# Altium PCB PCB_Sensores_PIC24-temp.PcbDoc (part 2 of 2)
Units mm, origin at the board's own origin, x right, y up, seen from the top; angles counter-clockwise.
Board outline 86.12 x 83.94 mm, 4 copper layers (Top Layer, Layer 1, Layer 4, Bottom Layer), stack 0.603 mm thick; 142 components, 90 nets, 531 pads, 94 vias.
Unrouted connection lines stored in the file: 1.
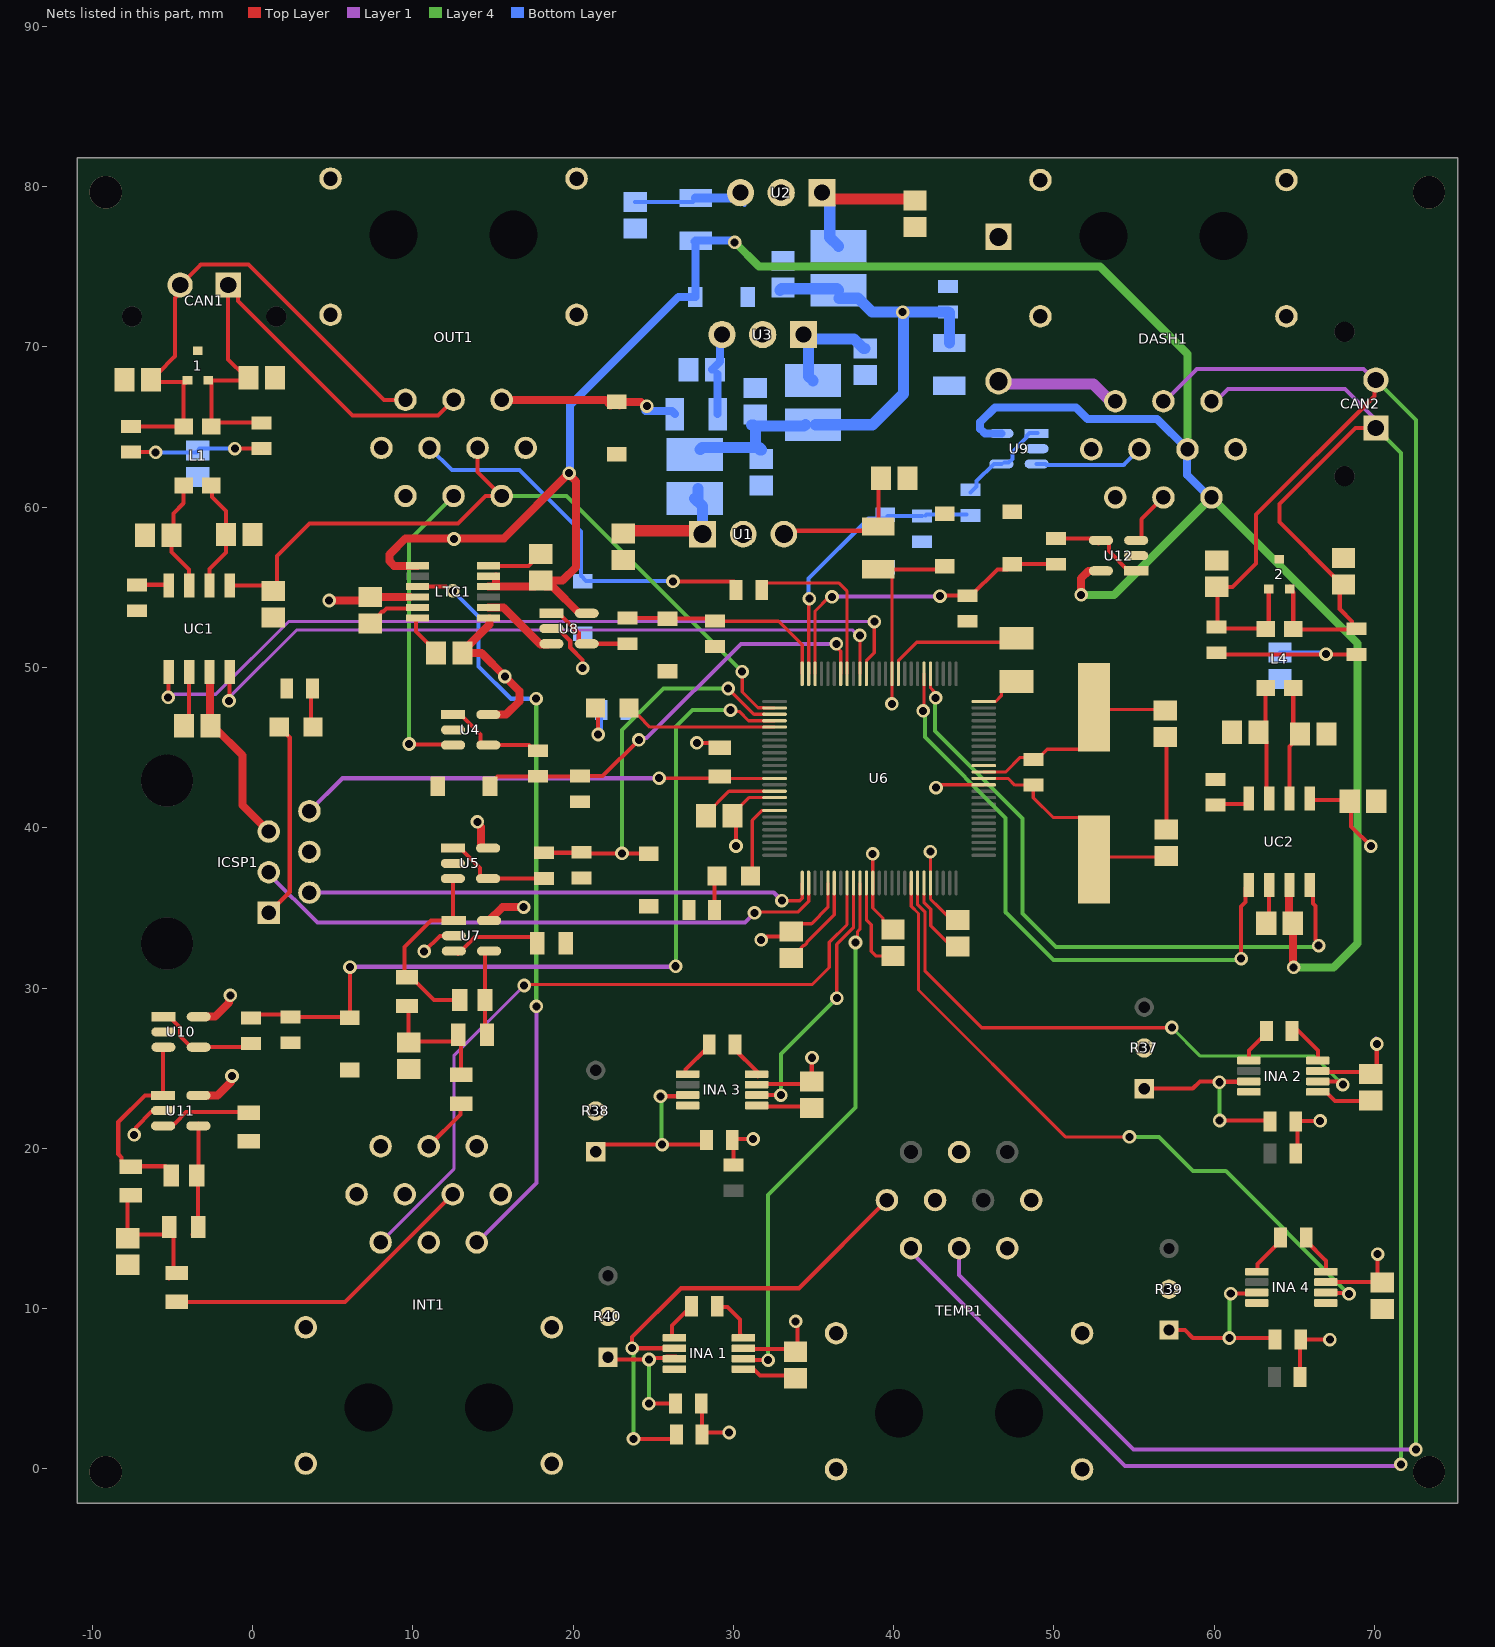
[diagram p4: the nets of this part, all layers, seen from the top]

## Via types
v1: diameter 0.85, hole 0.5, Top Layer to Bottom Layer, 90 vias
v2: diameter 2, hole 2, Top Layer to Bottom Layer, 4 vias

## Nets (pads, with @x,y where several pads share a name; then routed paths per layer and width w, separated by ;. In a path a pad name is that pad's centre, name@x,y a point inside that pad or via, vN(x,y) a via of type N, cw(c..) or ccw(c..) an arc to the next point about the centre after c; other vN are vias at no path point) (continued)
3.3V: "INA 1.7" "INA 2.7" "INA 3.7" "INA 4.7" C11.1 C12.1 C14.1 C15.1 C20.2 C21.2 C25.2 C26.2 CC2.2 CC4.2 F1.2 OUT1.3 OUT1.6 R28.1 R29.2 R30.1 R31.2 R32.1 R33.2 R34.1 R35.2 R36.1 U6.2 U6.16 U6.30 U6.37 U6.46 U6.62 U6.86 UC1.5 UC2.5 Z2.1 | length 124.6
  Top Layer w0.2: C11.1@29.98,41.09 30.179,41.09 30.969,41.88 U6.16@32.57,41.88 ; v1(30.55,49.74) 30.55,48.47 31.534,47.486 31.889,47.486 31.895,47.48 U6.2@32.57,47.48 ; C14.1@33.61,33.536 34.092,34.018 34.878,34.018 35.895,35.035 U6.30@35.895,36.555 ; v1@38.695,38.365 U6.37@38.695,36.555 38.695,34.995 39.332,34.358 39.332,34.183 39.676,33.839 C12.1@39.851,33.839 ; F1.2@39.423,56.126 39.895,55.655 U6.86@39.895,49.605 v1@39.895,47.742 ; v1@42.295,38.501 U6.46@42.295,36.555 42.295,35.88 42.295,35.55 42.802,35.043 43.329,34.516 C15.1@43.43,34.516 ; v1(42.64,42.5) 42.816,42.5 42.996,42.68 U6.62@45.62,42.68
  Top Layer w0.254: UC1.5@-1.415,54.685 UC1.5@-1.415,55.11 0.59,55.11 CC2.2@0.691,55.211 ; CC2.2@1.515,54.89 1.515,56.965 3.54,58.99 12.82,58.99 14.53,60.7 OUT1.3@15.54,60.7 14.04,62.2 OUT1.6@14.04,63.56 ; v1(27.72,45.3) 28.59,45.3 28.89,45 R28.1@29.14,45 ; R35.2@27.95,3.92 28.05,3.82 R36.1@28.05,2.16 28.16,2.27 v1(29.74,2.27) ; R32.1@29.9,18.85 R32.1@30,18.95 30,20.4 R31.2@29.97,20.43 ; R31.2@29.93,20.51 30.005,20.585 v1(31.23,20.585) ; C11.1@29.94,40.75 30.16,40.53 v1(30.16,38.86) ; 30.703,7.49 C21.2@33.42,7.49 ; 31.45,23.975 31.49,24.015 34.739,24.015 C26.2@34.89,24.166 34.89,25.635 v1(34.907,25.651) ; v1(31.731,33.002) 31.893,33.002 32.101,33.21 33.284,33.21 C14.1@33.61,33.536 ; v1(33.88,9.211) 33.99,9.101 C21.2@33.99,7.486 ; v1(38.689,38.371) v1@38.695,38.365 ; F1.2@39.05,56.126 39.423,56.126 Z2.1@42.963,56.126 ; v1(39.888,47.735) v1@39.895,47.742 ; v1(42.282,38.513) v1@42.295,38.501 ; Z2.1@42.954,56.253 Z2.1@43.09,56.39 ; R30.1@65.08,19.67 65.08,19.603 R30.1@65.19,19.493 ; R29.2@65.08,21.67 65.19,21.67 65.23,21.71 v1(66.61,21.71) ; R30.1@65.11,19.35 65.19,19.43 R30.1@65.19,19.493 ; R30.1@65.19,19.603 R30.1@65.19,19.493 ; R30.1@65.19,19.67 R29.2@65.19,21.55 ; R30.1@65.353,19.33 R30.1@65.19,19.493 ; R34.1@65.36,5.73 65.36,7.84 R33.2@65.52,8 ; R33.2@65.42,8.06 v1(67.21,8.06) ; UC2.5@65.95,41.73 68.055,41.73 CC4.2@68.07,41.745 ; 66.633,24.803 66.637,24.808 ; 66.91,24.76 C20.2@69.506,24.76 ; 66.98,11.58 67.055,11.655 69.821,11.655 C25.2@69.84,11.636 ; CC4.2@68.454,41.65 68.53,41.574 68.53,40.09 v1(69.77,38.85) ; C20.2@70.056,24.82 70.14,24.904 v1(70.14,26.51) ; v1(70.19,13.4) 70.19,12.136 70.726,11.6 C25.2@70.74,11.6
  Layer 1 w0.254: v1@69.77,38.733 v1(69.77,38.85) ; v1@69.97,26.73 v1@70.1,26.86
  Layer 4 w0.254: OUT1.3@15.65,60.77 15.72,60.7 19.59,60.7 v1(30.55,49.74)
4+: "INA 1.2" R36.2 TEMP1.7 | length 31.3
  Top Layer w0.254: v1(23.77,1.87) 26.177,1.87 26.45,2.143 R36.2@26.45,2.16 ; 26.32,7.525 26.317,7.528 23.683,7.528 v1(23.68,7.53) 23.68,8.22 26.73,11.27 34.08,11.27 TEMP1.7@39.58,16.77
  Layer 4 w0.254: v1(23.68,7.53) 23.77,7.44 v1(23.77,1.87)
12V: F3.2 OUT1.10 Z3.1 | length 11.5
  Top Layer w0.254: Z3.1@22.622,66.487 Z3.1@22.89,66.22
  Top Layer w0.5: OUT1.10@15.71,66.53 15.88,66.7 22,66.7 Z3.1@22.34,66.36 ; Z3.1@22.71,66.575 Z3.1@23.075,66.575 ; Z3.1@22.736,66.476 Z3.1@23.075,66.575 ; v1(24.601,66.309) 24.506,66.309 24.241,66.575 Z3.1@23.075,66.575
  Bottom Layer w0.5: v1@24.501,65.999 26.161,65.999 F3.2@26.35,65.81
24V: C3.1 C6.1 C9.1 F4.1 L2.1 L3.1 L5.1 RV1.1 | length 33.3
  Bottom Layer w0.7: L2.1@27.93,63.6 28.055,63.725 31.514,63.725 ; 31.13,65.12 31.255,65.12 31.315,65.06 ; 31.31,65.06 31.315,65.06 ; C6.1@32.9,73.53 32.995,73.625 36.46,73.625 L3.1@36.55,73.535 ; L5.1@34.49,65.145 34.405,65.06 31.315,65.06 ; L5.1@35.125,65.145 38.685,65.145 40.62,67.08 40.62,72.111 v1(40.563,72.168) ; L3.1@36.59,73.04 37.77,73.04 38.64,72.17 RV1.1@43.39,72.17 ; RV1.1@43.46,72.14 43.48,72.12 F4.1@43.48,70.243 ; 31.315,65.06 31.382,64.993 31.382,63.857 31.514,63.725 ; 31.514,63.725 31.659,63.58 31.76,63.58 31.615,63.725 31.514,63.725
+5: C22.1 C23.1 C24.1 CC1.1 CC3.1 DASH1.3 DASH1.6 F2.2 ICSP1.5 INT1.3 INT1.6 INT1.9 LTC1.1 LTC1.4 LTC1.5 LTC1.7 LTC1.10 U4.5 U5.5 U7.5 U8.5 U9.5 U10.5 U11.5 U12.5 UC1.3 UC2.3 Z1.1 | length 200
  Top Layer w0.5: U11.5@-3.379,23.3 -2.19,23.3 -1.346,24.144 -1.346,24.445 v1(-1.279,24.512) ; U10.5@-3.36,28.21 -2.34,28.21 -1.458,29.092 -1.458,29.474 v1(-1.391,29.541) ; CC1.1@-2.66,46.55 -2.66,46.485 -2.45,46.275 -2.385,46.275 -0.63,44.52 -0.63,41.405 ICSP1.5@1.01,39.765 ; UC1.3@-2.66,49.39 -2.66,47.168 -2.655,47.163 CC1.1@-2.655,46.825 ; v1(4.781,54.179) 7.124,54.179 C22.1@7.34,54.396 7.345,54.39 LTC1.10@9.825,54.39 ; LTC1.7@10.298,56.345 8.828,56.345 8.535,56.638 8.535,57.052 9.543,58.06 v1@12.57,58.06 ; v1(12.57,58.02) v1@12.57,58.06 ; v1(14.03,40.37) 14.03,40.275 14.249,40.056 14.249,38.763 14.283,38.73 U5.5@14.697,38.73 ; U4.5@14.71,47.06 15.82,47.06 16.643,47.883 16.643,48.537 v1(15.74,49.44) 15.74,49.45 14.29,50.9 C23.1@13.106,50.9 13.106,51.001 14.79,52.685 LTC1.1@14.79,53.07 ; LTC1.4@14.722,55.045 LTC1.4@15.225,55.045 ; U7.5@14.756,34.21 15.592,35.046 v1(16.909,35.046) ; LTC1.5@15.184,55.67 15.184,55.086 LTC1.4@15.225,55.045 ; C24.1@18.08,55.24 18.273,55.047 18.718,55.047 20.384,53.38 U8.5@20.851,53.38 ; v1(51.693,54.531) 51.693,55.563 52.146,56.016 52.916,56.016 U12.5@52.93,56.03 ; UC2.3@64.65,36.05 64.65,34.286 CC3.1@64.896,34.04 64.943,33.993 64.923,33.973 64.923,31.317 v1(64.95,31.29) ; v1@12.57,58.06 15.68,58.06 v1(19.75,62.13) 19.75,62.035 20.19,61.595 20.19,56.27 19.344,55.424 C24.1@17.97,55.424 17.593,55.047 17.201,55.047 17.199,55.045 LTC1.4@15.225,55.045
  Layer 4 w0.5: v1(30.081,76.53) 31.601,75.01 52.87,75.01 58.33,69.55 DASH1.6@58.33,63.61 ; v1(51.693,54.531) 53.751,54.531 DASH1.3@59.83,60.61 ; DASH1.3@60.076,60.316 60.124,60.316 68.93,51.51 68.93,32.78 67.44,31.29 v1@64.986,31.29
  Bottom Layer w0.5: v1(19.75,62.13) 19.817,62.197 19.817,66.367 26.563,73.113 Z1.1@27.625,73.113 27.625,76.525 F2.2@27.58,76.57 ; F2.2@27.64,76.626 29.89,76.626 30,76.516 v1@30,76.45 ; U9.5@46.72,64.6 45.69,64.6 45.397,64.893 45.397,65.307 46.32,66.23 51.38,66.23 52.1,65.51 56.43,65.51 DASH1.6@58.33,63.61 ; DASH1.6@58.31,63.51 58.31,62.01 DASH1.3@59.81,60.51
AN_AUX1: R26.1 R27.1 U6.98 Z9.1 | length 20.1
  Top Layer w0.2: U6.98@35.095,49.605 35.095,53.522 35.983,54.41 v1(36.15,54.41)
  Top Layer w0.254: v1(42.888,54.449) 42.92,54.48 R27.1@44.61,54.48 44.835,54.48 46.472,56.117 47.097,56.117 Z9.1@47.37,56.39 ; Z9.1@47.41,56.445 49.935,56.445 R26.1@50.05,56.56
  Layer 1 w0.254: v1(36.15,54.41) 36.169,54.429 42.869,54.429 v1(42.888,54.449)
AN_AUX2: R17.1 R20.1 U6.99 Z7.1 | length 17.3
  Top Layer w0.2: U6.99@34.695,49.605 34.695,54.251 v1(34.737,54.293)
  Bottom Layer w0.254: v1(34.737,54.293) 34.68,54.35 34.68,55.54 38.42,59.28 Z7.1@39.72,59.28 ; Z7.1@39.63,59.45 R20.1@41.78,59.45 ; R20.1@41.99,59.48 42.06,59.55 R17.1@44.53,59.55
AUX: INT1.10 U6.33 | length 44.3
  Top Layer w0.2: v1(16.946,30.159) 17.008,30.22 34.92,30.22 35.98,31.28 35.98,32.853 37.086,33.959 U6.33@37.086,35.8
  Layer 1 w0.2: INT1.10@8.12,14.03 8.12,14.26 12.563,18.703 12.563,25.775 v1(16.946,30.159)
AUX1: DASH1.2 U12.3 | length 3.4
  Top Layer w0.254: U12.3@55.13,57.93 55.323,57.93 55.47,58.077 55.47,59.25 56.66,60.44 DASH1.2@56.8,60.44
AUX2: DASH1.5 U9.3 | length 6.8
  Bottom Layer w0.254: U9.3@48.921,62.7 49.474,62.7 49.541,62.633 54.353,62.633 55.19,63.47 DASH1.5@55.35,63.47
CANH_0: 2.1 CAN2.2 CHB3.1 DASH1.9 L4.3 RCH2.2 TEMP1.9 | length 142.1
  Top Layer w0.254: CHB3.1@60.15,55.034 61.144,55.034 62.61,56.5 62.61,59.54 69.993,66.923 69.993,67.848 CAN2.2@70.085,67.94 CAN2.2@70.085,67.811 ; RCH2.2@60.19,52.47 60.2,52.48 CHB3.1@60.2,54.86 ; RCH2.2@60.51,52.44 L4.3@63.18,52.44 ; L4.3@63.2,52.39 63.4,52.59 63.4,54.81 2.1@63.52,54.93 ; CAN2.2@70.29,67.735 CAN2.2@70.29,67.82
  Layer 1 w0.254: TEMP1.9@44.08,13.77 44.08,12.09 54.96,1.21 v1(72.582,1.21) ; DASH1.9@56.81,66.51 58.91,68.61 69.316,68.61 69.986,67.94 CAN2.2@70.085,67.94
  Layer 4 w0.254: CAN2.2@70.29,67.735 72.582,65.443 v1(72.582,1.21)
CANH_3: 1.1 CAN1.2 CHB2.1 L1.3 OUT1.8 RCH1.2 | length 32.4
  Top Layer w0.254: RCH1.2@-7.048,65.04 L1.3@-4.295,65.04 -4.295,67.705 1.1@-4.215,67.785 ; CHB2.1@-6.298,67.867 -5.937,68.228 -5.937,68.323 -4.84,69.42 -4.84,73.053 -4.772,73.121 -4.772,73.608 CAN1.2@-4.52,73.86 ; CHB2.1@-6.25,67.82 -4.25,67.82 1.1@-4.215,67.785 ; CAN1.2@-4.36,74.03 -4.35,74.03 -3.23,75.15 -0.26,75.15 8.19,66.7 OUT1.8@9.54,66.7 ; 1.1@-4.17,67.74 1.1@-4.215,67.785 ; 1.1@-4.17,67.82 1.1@-4.01,67.82
CANL_0: 2.2 CAN2.1 CLB3.1 DASH1.10 L4.2 RCL2.2 TEMP1.10 | length 138.8
  Top Layer w0.254: 2.2@64.72,55.04 64.72,54.905 64.93,54.695 L4.2@64.93,52.39 64.95,52.37 RCL2.2@68.87,52.37 ; RCL2.2@68.733,52.41 68.6,52.543 68.6,52.88 67.83,53.65 67.83,55.313 64.07,59.073 64.07,60.2 68.81,64.94 CAN2.1@70.085,64.94
  Layer 1 w0.254: TEMP1.10@40.57,13.54 TEMP1.10@41.08,13.54 ; TEMP1.10@41.08,13.77 TEMP1.10@41.08,13.54 ; DASH1.10@59.81,66.51 59.982,66.51 60.852,67.38 68.145,67.38 CAN2.1@70.655,64.87 ; v1(71.64,0.28) 71.54,0.18 54.44,0.18 TEMP1.10@41.08,13.54
  Layer 4 w0.254: CAN2.1@70.085,64.94 71.64,63.385 v1(71.64,0.28)
CANL_3: 1.2 CAN1.1 CLB2.1 L1.2 OUT1.9 RCL1.2 | length 33.1
  Top Layer w0.254: 1.2@-2.755,67.915 CLB2.1@-0.48,67.915 ; 1.2@-2.69,67.87 -2.565,67.745 L1.2@-2.565,65.07 ; L1.2@-2.4,65.07 -2.18,65.29 RCL1.2@0.404,65.29 ; CLB2.1@-0.48,67.83 CLB2.1@-0.48,67.915 ; CLB2.1@-0.21,67.915 CLB2.1@-0.13,67.995 ; OUT1.9@12.54,66.7 11.563,65.723 6.237,65.723 -0.91,72.87 -0.91,73.25 CAN1.1@-1.3,73.64 ; CAN1.1@-1.52,73.86 CAN1.1@-1.3,73.64 ; CAN1.1@-1.52,73.86 -1.3,73.86 CAN1.1@-1.3,73.64 ; CAN1.1@-1.52,73.86 -1.52,69.225 -0.48,68.185 CLB2.1@-0.48,67.915
CAUDAL_A: LTC1.2 U8.3 | length 4.7
  Top Layer w0.5: LTC1.2@14.722,53.745 15.648,53.745 17.963,51.43 U8.3@18.43,51.43
CAUDAL_P: INT1.8 LTC1.9 | length 47.5
  Top Layer w0.254: LTC1.9@10.297,55.044 12.074,55.044 12.339,54.78 v1(12.5,54.78)
  Layer 1 w0.254: INT1.8@13.99,14.13 17.71,17.85 v1(17.71,28.86)
  Layer 4 w0.254: v1(17.69,48.05) 17.7,48.04 17.7,28.87 v1(17.71,28.86)
  Bottom Layer w0.254: v1@12.66,54.78 12.66,54.62 14.105,53.175 14.105,50.065 16.12,48.05 v1(17.69,48.05)
CAUDAL_reg: R14.1 R15.1 U6.100 Z6.1 | length 13
  Top Layer w0.2: R15.1@29.28,52.89 32.82,52.89 34.295,51.415 U6.100@34.295,49.605
  Top Layer w0.254: R14.1@23.38,53.08 Z6.1@25.87,53.08 ; Z6.1@25.89,53.045 28.925,53.045 R15.1@28.96,53.01
DIRECCION: OUT1.5 R24.1 Z10.1 | length 24.2
  Top Layer w0.254: v1(26.23,55.37) 30.05,55.37 R24.1@30.17,55.25
  Bottom Layer w0.254: OUT1.5@11.04,63.7 12.43,62.31 16.66,62.31 20.48,58.49 20.48,55.725 20.808,55.397 26.203,55.397 v1(26.23,55.37)
GND: 1.3 2.3 "INA 1.4" "INA 1.5" "INA 2.4" "INA 2.5" "INA 3.4" "INA 3.5" "INA 4.4" "INA 4.5" C1.2 C2.2 C3.2 C4.2 C5.2 C6.2 C7.2 C8.2 C9.2 C11.2 C12.2 C13.2 C14.2 C15.2 C17.2 C18.2 C19.2 C20.1 C21.1 C22.2 C23.2 C24.2 C25.1 C26.1 CAP1.1 CB1.2 CB2.2 CC1.2 CC2.1 CC3.2 CC4.1 CHB1.2 CHB2.2 CHB3.2 CHB4.2 CLB1.2 CLB2.2 CLB3.2 CLB4.2 DASH1.1 DASH1.4 DASH1.7 DASH1.MH1 DASH1.MH2 DASH1.MH5 DASH1.MH6 DR1.1 ICSP1.4 INT1.1 INT1.4 INT1.7 INT1.MH1 INT1.MH2 INT1.MH5 INT1.MH6 LTC1.6 LTC1.11 LTC1.12 OUT1.1 OUT1.4 OUT1.7 OUT1.MH1 OUT1.MH2 OUT1.MH5 OUT1.MH6 R1.2 R2.2 R3.1 R4.1 R5.1 R9.2 R10.2 R11.2 R15.2 R19.2 R20.2 R21.2 R27.2 R37.2 R38.2 R39.2 R40.2 RV1.2 TEMP1.2 TEMP1.4 TEMP1.6 TEMP1.8 TEMP1.MH1 TEMP1.MH2 TEMP1.MH5 TEMP1.MH6 U1.2 U2.2 U3.2 U4.2 U5.2 U6.15 U6.31 U6.36 U6.45 U6.65 U6.75 U7.2 U8.2 U9.2 U10.2 U11.2 U12.2 UC1.2 UC2.2 Z1.2 Z2.2 Z3.2 Z4.2 Z5.2 Z6.2 Z7.2 Z8.2 Z9.2 Z10.2 | length 59.3
  Top Layer w0.2: C11.2@28.288,40.75 28.288,40.851 29.718,42.28 U6.15@31.922,42.28 ; C14.2@33.61,31.884 33.711,31.884 34.238,32.412 34.238,32.512 34.384,32.658 34.442,32.658 34.588,32.805 34.588,32.862 36.295,34.569 U6.31@36.295,35.907 ; U6.36@38.295,35.907 38.295,34.262 38.6,33.957 38.6,32.29 38.886,32.004 C12.2@39.687,32.004 ; C12.2@39.626,31.723 C12.2@39.707,31.642 ; C12.2@39.687,31.783 C12.2@39.687,32.004 ; C12.2@39.687,32.066 C12.2@39.687,32.004 ; C12.2@39.96,32.004 C12.2@39.687,32.004 ; U6.45@41.899,35.907 41.899,35.328 42.31,34.917 42.31,33.883 43.329,32.864 C15.2@43.43,32.864 ; U6.75@45.62,47.88 46.37,47.88 46.722,48.232 46.722,48.537 47.195,49.01 CAP1.1@47.66,49.01
  Top Layer w0.254: v1(-7.387,20.838) -7.273,20.952 -7.273,21.307 -6.291,22.289 -5.641,22.289 U11.2@-5.58,22.35 ; CC1.2@-3.955,46.701 UC1.2@-3.955,49.71 ; C22.2@7.34,52.744 7.441,52.744 7.941,53.245 7.941,53.343 8.09,53.491 8.183,53.491 8.361,53.67 LTC1.11@9.703,53.67 ; LTC1.12@10.2,53.08 10.2,52.255 11.454,51.001 C23.2@11.454,50.9 ; v1(10.709,32.286) 11.682,33.26 U7.2@12.555,33.26 ; LTC1.6@14.712,56.335 17.22,56.335 17.369,56.484 17.369,56.575 17.869,57.076 C24.2@17.97,57.076 ; U8.2@18.65,52.43 19.03,52.43 19.821,51.639 19.821,51.247 20.597,50.472 v1(20.597,49.958) ; 30.796,6.252 31.232,6.252 31.649,5.834 C21.1@33.51,5.834 ; 31.45,22.675 31.514,22.611 34.794,22.611 C26.1@34.89,22.514 ; C19.2@57.01,39.896 57.01,45.75 C18.2@57.02,45.76 ; UC2.2@63.34,36.16 63.425,36.075 63.425,34.12 CC3.2@63.345,34.04 ; 66.83,23.5 66.98,23.5 67.526,22.954 C20.1@69.34,22.954
  other v2: -9.16,-0.2 73.4,-0.2 -9.16,79.65 73.4,79.65
LED_0: D2.1 U6.18 | length 5.2
  Top Layer w0.2: D2.1@31.07,36.99 31.18,37.1 31.18,40.46 31.8,41.08 U6.18@32.57,41.08
LED_1: D1.1 U6.5 | length 9.6
  Top Layer w0.2: D1.1@23.49,47.48 23.99,46.98 24.09,46.98 24.79,46.28 U6.5@32.57,46.28
MCLR: ICSP1.6 R28.2 U6.13 | length 29.6
  Top Layer w0.2: v1(25.37,43.09) 29.03,43.09 R28.2@29.14,43.2 ; R28.2@29.44,43.14 29.5,43.08 U6.13@32.57,43.08
  Layer 1 w0.254: ICSP1.6@3.55,41.035 5.605,43.09 v1(25.37,43.09)
NetC1_1: C1.1 L3.2 U2.1 | length 8.6
  Top Layer w0.254: C1.1@41.236,79.22 C1.1@41.33,79.126
  Top Layer w0.7: U2.1@35.76,79.22 C1.1@41.236,79.22
  Bottom Layer w0.7: U2.1@36.01,79.08 36.01,76.825 L3.2@36.55,76.285
NetC2_1: C2.1 F2.1 U2.3 | length 7
  Bottom Layer w0.254: C2.1@23.87,79.052 27.482,79.052 F2.1@27.61,79.18 ; F2.1@27.64,79.293 F2.1@27.646,79.3 ; U2.3@30.24,79.3 U2.3@30.68,78.86
  Bottom Layer w0.555: F2.1@27.646,79.3 U2.3@30.24,79.3
NetC4_1: C4.1 L2.2 U1.1 | length 8.1
  Top Layer w0.254: C4.1@23.18,58.65 C4.1@23.21,58.68 ; U1.1@28.07,58.53 U1.1@28.08,58.53
  Top Layer w0.7: C4.1@23.11,58.53 U1.1@28.07,58.53
  Bottom Layer w0.7: L2.2@27.59,60.545 28.07,60.065 U1.1@28.07,58.319 ; L2.2@27.8,60.545 L2.2@27.8,61.16
NetC5_1: C5.1 F1.1 U1.3 | length 9.5
  Top Layer w0.254: U1.3@33.16,58.53 38.83,58.53 F1.1@39.05,58.75 ; F1.1@39.05,58.793 39.05,62.16 C5.1@39.12,62.23
  Bottom Layer w0.254: U1.3@33.16,58.69 U1.3@33.19,58.66
NetC7_1: C7.1 L5.2 U3.1 | length 7.4
  Bottom Layer w0.7: U3.1@34.24,70.72 U3.1@34.285,70.72 ; L5.2@34.958,67.895 34.688,68.166 34.688,70.452 U3.1@34.37,70.77 34.647,70.493 37.519,70.493 38.116,69.896 C7.1@38.217,69.896
NetC8_1: C8.1 F3.1 U3.3 | length 5
  Bottom Layer w0.254: C8.1@28.97,68.37 C8.1@29.017,68.323
  Bottom Layer w0.5: C8.1@28.672,68.58 29.172,69.08 29.172,70.442 U3.3@29.4,70.67 ; F3.1@29.017,65.81 C8.1@29.017,68.323
NetC10_1: C10.1 R13.2 U7.4 | length 5.7
  Top Layer w0.254: R13.2@14.726,27.15 14.506,27.37 C10.1@14.506,29.25 14.506,32.163 14.753,32.41 U7.4@15.016,32.41
NetC10_2: C10.2 R6.2 U5.3 U7.1 | length 12.1
  Top Layer w0.254: R6.2@9.796,30.68 R6.2@9.636,30.68 9.49,30.826 9.49,32.57 11.13,34.21 U7.1@12.555,34.21 ; R6.2@9.886,30.68 11.316,29.25 C10.2@12.926,29.25 ; U7.1@12.496,34.36 U5.3@12.496,36.83 12.496,36.89 U5.3@12.546,36.94
NetC13_1: C13.1 R6.1 R12.2 R13.1 | length 7.9
  Top Layer w0.254: R6.1@9.666,28.72 9.736,28.65 C13.1@9.736,26.606 ; C13.1@9.886,26.67 12.503,26.67 12.826,26.993 R13.1@12.826,27.08 ; R13.1@12.846,26.88 13.016,26.71 R12.2@13.016,24.45 ; R12.2@13.07,24.72 R12.2@13.17,24.82
NetC16_1: C16.1 R23.2 U11.4 | length 6.9
  Top Layer w0.254: R23.2@-3.73,14.62 -3.407,14.943 -3.407,17.983 C16.1@-3.32,18.07 ; C16.1@-3.49,18.3 -3.379,18.411 U11.4@-3.379,21.4 -3.379,21.529 U11.4@-3.39,21.54
NetC16_2: C16.2 R16.2 U10.3 U11.1 | length 12.4
  Top Layer w0.254: R16.2@-7.6,18.86 -7.85,18.86 -8.173,19.183 -8.173,19.433 -8.38,19.64 -8.38,21.64 -6.72,23.3 U11.1@-5.58,23.3 -5.58,26.163 -5.493,26.25 U10.3@-5.48,26.25 ; R16.2@-7.6,18.88 -5.435,18.88 -5.13,18.575 C16.2@-5.13,18.5
NetC17_1: C17.1 R16.1 R22.2 R23.1 | length 8.1
  Top Layer w0.254: R16.1@-7.79,17.015 -7.79,14.62 R23.1@-5.53,14.62 ; R22.2@-5.2,11.88 -4.943,12.137 -4.943,14.833 R23.1@-5.2,15.09
NetCB1_1: CB1.1 RCH1.1 RCL1.1 | length 8
  Top Layer w0.254: RCH1.1@-7.58,63.44 -6.059,63.44 v1(-6.044,63.425) ; v1(-1.1,63.65) -1.09,63.66 RCL1.1@0.55,63.66
  Bottom Layer w0.254: v1(-6.044,63.425) -3.505,63.425 CB1.1@-3.46,63.47 ; CB1.1@-3.33,63.62 -3.3,63.65 v1(-1.1,63.65)
NetCB2_1: CB2.1 RCH2.1 RCL2.1 | length 11.5
  Top Layer w0.254: RCH2.1@60.13,50.92 60.23,50.82 RCL2.1@68.63,50.82
  Bottom Layer w0.254: CB2.1@64.1,50.936 66.866,50.936 v1(66.974,50.828)
NetCHB1_1: CHB1.1 L1.4 UC1.7 | length 7
  Top Layer w0.254: CHB1.1@-5.05,58.24 -5.05,57.21 -3.955,56.115 UC1.7@-3.955,55.11 ; CHB1.1@-4.93,58.24 -4.93,59.612 -4.295,60.247 L1.4@-4.295,61.36
NetCHB4_1: CHB4.1 L4.4 UC2.7 | length 7.1
  Top Layer w0.254: CHB4.1@62.86,45.83 63.2,46.17 L4.4@63.2,48.71 ; CHB4.1@62.9,45.65 62.975,45.65 63.266,45.359 63.266,41.989 UC2.7@63.425,41.83
NetCLB1_1: CLB1.1 L1.1 UC1.6 | length 7
  Top Layer w0.254: UC1.6@-2.685,55.11 -2.685,56.145 -1.666,57.164 CLB1.1@-1.666,58.3 -1.666,59.756 -2.538,60.628 -2.538,61.333 L1.1@-2.565,61.36
NetCLB4_1: CLB4.1 L4.1 UC2.6 | length 7.3
  Top Layer w0.254: UC2.6@64.695,41.83 64.695,45.06 65.305,45.67 CLB4.1@65.34,45.67 ; L4.1@64.93,48.71 64.93,46.12 CLB4.1@65.34,45.71
NetD1_2: D1.2 R3.2 | length 3.5
  Top Layer w0.254: D1.2@21.42,47.6 21.565,47.455 v1(21.565,45.822)
  Bottom Layer w0.254: v1(21.565,45.822) 21.75,46.007 R3.2@21.75,47.29 ; R3.2@21.715,47.255 R3.2@21.75,47.29 ; R3.2@21.75,47.36 R3.2@21.75,47.29
NetD2_2: D2.2 R4.2 | length 2.1
  Top Layer w0.254: R4.2@28.82,34.86 28.82,36.71 D2.2@28.98,36.87
NetD3_2: D3.2 R5.2 | length 1.9
  Top Layer w0.254: R5.2@3.57,48.67 3.65,48.59 D3.2@3.65,46.79
NetDASH1_8: DASH1.8 DR1.2 F4.2 | length 8.2
  Layer 1 w0.7: DR1.2@46.103,67.68 52.451,67.68 53.387,66.744 53.576,66.744 DASH1.8@53.81,66.51
"NetINA 1_1": "INA 1.1" R41.2 | length 2.3
  Top Layer w0.254: 26.175,8.338 26.175,8.958 R41.2@27.355,10.138
"NetINA 1_8": "INA 1.8" R41.1 | length 3.1
  Top Layer w0.254: R41.1@28.995,10.148 29.037,10.106 29.627,10.106 30.415,9.318 30.415,8.406 30.533,8.288 30.765,8.288
"NetINA 2_1": "INA 2.1" R42.2 | length 2.3
  Top Layer w0.254: 62.16,25.475 62.16,26.096 62.896,26.832 62.977,26.832 63.15,27.005 R42.2@63.15,27.28
"NetINA 2_8": "INA 2.8" R42.1 | length 2.4
  Top Layer w0.254: R42.1@65.2,27.37 66.46,26.11 66.46,25.475
"NetINA 3_1": "INA 3.1" R43.2 | length 2.5
  Top Layer w0.254: 27.02,24.51 27.02,24.925 28.37,26.275 R43.2@28.37,26.5
"NetINA 3_8": "INA 3.8" R43.1 | length 2.7
  Top Layer w0.254: R43.1@29.97,26.5 29.97,26.275 31.52,24.725 31.52,24.492
"NetINA 4_1": "INA 4.1" R44.2 | length 2.8
  Top Layer w0.254: 62.66,12.305 62.692,12.337 62.692,12.777 64.22,14.305 R44.2@64.22,14.49
"NetINA 4_8": "INA 4.8" R44.1 | length 2.6
  Top Layer w0.254: R44.1@65.74,14.45 65.74,14.225 66.98,12.985 66.98,12.35
NetR1_1: R1.1 UC1.8 | length 1.8
  Top Layer w0.254: R1.1@-7.08,55.16 -5.26,55.16 UC1.8@-5.24,55.18
NetR2_1: R2.1 UC2.8 | length 2.2
  Top Layer w0.254: R2.1@60.09,41.47 62.06,41.47 UC2.8@62.22,41.63
NetR7_2: R7.2 U4.1 U4.4 | length 6.5
  Top Layer w0.254: U4.1@12.63,47.15 12.886,47.15 14.209,45.827 14.209,45.307 14.356,45.16 U4.4@14.71,45.16 17.245,45.16 17.575,44.83 R7.2@17.89,44.83
NetR8_2: R8.2 U5.1 U5.4 | length 6.2
  Top Layer w0.254: U5.1@12.786,38.74 12.952,38.74 14.195,37.497 14.195,36.977 14.342,36.83 U5.4@14.697,36.83 ; U5.4@15.016,36.83 18.176,36.83 R8.2@18.186,36.84
NetR10_1: R10.1 U7.3 | length 5.9
  Top Layer w0.254: U7.3@12.816,32.13 13.866,33.18 17.617,33.18 17.94,32.857 R10.1@17.94,32.68
NetR14_2: R14.2 U8.1 U8.4 | length 5.8
  Top Layer w0.254: U8.1@18.65,53.38 19.117,53.38 20.349,52.147 20.349,51.627 20.526,51.45 U8.4@20.74,51.45 ; U8.4@20.851,51.48 R14.2@23.38,51.48 23.44,51.48 R14.2@23.48,51.52
NetR17_2: R17.2 U9.1 U9.4 | length 6
  Bottom Layer w0.254: R17.2@44.79,60.91 45.178,61.298 45.178,61.625 46.253,62.7 U9.4@46.72,62.7 ; U9.4@46.901,62.776 47.176,62.776 47.403,63.002 47.403,63.443 48.295,64.335 48.295,64.441 48.48,64.626 U9.1@48.982,64.626
NetR18_2: R18.2 U10.1 U10.4 | length 6.9
  Top Layer w0.254: U10.1@-5.36,28.37 -4.531,27.541 -4.531,27.015 -3.826,26.31 U10.4@-3.36,26.31 0,26.31 R18.2@0.26,26.57
NetR19_1: R19.1 U11.3 | length 5.2
  Top Layer w0.254: U11.3@-5.58,21.4 -5.027,21.4 -4.868,21.559 -4.841,21.559 -4.14,22.26 R19.1@-0.722,22.26
NetR24_2: R24.2 U6.93 | length 10.5
  Top Layer w0.2: R24.2@31.98,55.28 36.56,55.28 37.095,54.745 U6.93@37.095,49.605
NetR26_2: R26.2 U12.1 U12.4 | length 6
  Top Layer w0.254: R26.2@50.12,58.04 52.47,58.04 U12.4@52.78,57.73 ; U12.4@53.01,57.98 53.234,57.98 53.431,57.783 53.431,57.263 54.664,56.03 U12.1@55.13,56.03
OSC1: "OSC 1.2" C19.1 R25.2 U6.63 | length 14.8
  Top Layer w0.2: U6.63@46.268,43.076 47.144,43.076 47.56,42.66 R25.2@48.71,42.66 48.71,41.879 49.946,40.643 51.617,40.643 52.49,39.77 52.49,38.02 52.64,38.17 C19.1@57.47,38.17
OSC2: "OSC 1.1" C18.1 R25.1 U6.64 | length 14
  Top Layer w0.2: U6.64@45.62,43.48 46.994,43.48 47.902,44.388 48.582,44.388 R25.1@48.71,44.26 ; R25.1@48.877,44.202 49.572,44.897 51.617,44.897 52.49,45.77 52.49,47.52 52.626,47.384 C18.1@56.87,47.384
PGC: ICSP1.2 U6.26 | length 32
  Top Layer w0.2: v1(33.02,35.452) 34.146,35.452 34.295,35.601 U6.26@34.295,36.555
  Layer 1 w0.254: ICSP1.2@3.565,35.955 32.517,35.955 v1(33.02,35.452)
PGD: ICSP1.3 U6.27 | length 35.9
  Top Layer w0.2: v1(31.32,34.69) 31.38,34.75 34.046,34.75 34.699,35.403 U6.27@34.699,35.83
  Layer 1 w0.254: ICSP1.3@1.07,37.12 1.07,37.053 4.04,34.084 30.714,34.084 v1(31.32,34.69) v1@31.31,34.7
PGM: D3.1 ICSP1.1 | length 12.4
  Top Layer w0.254: ICSP1.1@1.01,34.685 2.32,35.995 2.32,45.63 D3.1@1.67,46.28
Rx_Can: U6.80 UC2.4 | length 40.7
  Top Layer w0.2: U6.80@42.295,49.605 42.295,48.725 42.496,48.524 42.496,48.234 v1(42.62,48.11)
  Top Layer w0.254: UC2.4@65.965,36.43 66.163,36.232 66.163,35.287 66.32,35.13 66.32,33.001 66.51,32.811 v1(66.51,32.65)
  Layer 4 w0.254: v1(42.62,48.11) 42.575,48.065 42.575,46.045 48.043,40.577 48.043,34.657 50.13,32.57 66.43,32.57 v1(66.51,32.65)
RX_CAN3: U6.91 UC1.4 | length 45.3
  Top Layer w0.2: U6.91@37.892,49.607 v1@37.892,51.952
  Top Layer w0.254: v1(-1.467,47.919) -1.441,47.945 -1.441,49.441 UC1.4@-1.45,49.45 ; v1@37.892,51.952 v1@37.94,52
  Layer 1 w0.2: v1@-1.55,48.04 -1.522,48.04 -1.256,48.306 -1.256,48.334 2.75,52.34 36.521,52.34 36.526,52.336 37.448,52.336 37.774,52.01 v1(37.89,52.01)
SD_amp: R8.1 R11.1 U6.3 Z5.1 | length 24.4
  Top Layer w0.2: v1(29.67,48.69) 30.279,48.081 31.28,47.08 U6.3@31.922,47.08
  Top Layer w0.254: R8.1@18.186,38.44 R11.1@20.041,38.44 ; R11.1@20.536,38.47 20.606,38.4 22.91,38.4 v1@23.02,38.29 ; v1(23.05,38.4) 24.54,38.4 Z5.1@24.65,38.29
  Layer 4 w0.254: v1(23.05,38.4) 23.05,46.11 25.63,48.69 v1(29.67,48.69)
SD_ruido: INT1.2 R12.1 | length 3.5
  Top Layer w0.254: INT1.2@10.99,20.13 12.968,22.108 12.968,22.728 R12.1@13.03,22.79
SI_amp: R18.1 R21.1 U6.4 Z8.1 | length 51.7
  Top Layer w0.2: v1(29.82,47.34) 29.903,47.257 30.363,47.257 30.94,46.68 U6.4@32.57,46.68
  Top Layer w0.254: R18.1@-0.09,28.14 0.12,28.35 R21.1@2.49,28.35 ; R21.1@2.37,28.19 6.05,28.19 6.08,28.22 v1(6.08,31.3) ; Z8.1@6.19,28.19 Z8.1@6.21,28.21
  Layer 1 w0.254: v1(6.08,31.3) 6.11,31.33 26.37,31.33 v1(26.4,31.36)
  Layer 4 w0.254: v1(26.4,31.36) 26.429,31.389 26.429,46.319 27.45,47.34 v1(29.82,47.34)
SI_ruido: INT1.5 R22.1 | length 19.8
  Top Layer w0.254: R22.1@-4.72,10.42 5.78,10.42 12.27,16.91 INT1.5@12.37,16.91
T1: "INA 2.6" U6.44 | length 36.3
  Top Layer w0.2: U6.44@41.495,36.555 41.495,35.199 41.96,34.734 41.96,31.049 45.489,27.52 57.35,27.52 57.354,27.524 v1(57.354,27.54)
  Top Layer w0.254: 66.46,24.175 67.654,24.175 67.859,23.97 v1(68.02,23.97)
  Layer 4 w0.2: v1(57.354,27.54) 59.139,25.755 66.235,25.755 67.95,24.04 v1@67.95,23.98
T2: "INA 3.6" U6.34 | length 15.9
  Top Layer w0.2: v1(36.45,29.37) 36.45,32.72 37.49,33.76 U6.34@37.49,35.872
  Top Layer w0.254: 31.45,23.325 32.951,23.325 v1(32.963,23.313)
  Layer 4 w0.254: v1@32.97,23.33 32.963,23.337 32.963,25.883 v1(36.45,29.37)
T3: "INA 4.6" U6.43 | length 43
  Top Layer w0.2: U6.43@41.095,36.555 41.095,35.104 41.55,34.649 41.55,29.88 50.717,20.713 v1(54.711,20.713)
  Top Layer w0.254: 67.06,10.93 67.092,10.963 68.368,10.963 v1(68.41,10.92)
  Layer 4 w0.254: v1(54.711,20.713) 56.547,20.713 58.67,18.59 60.719,18.59 68.389,10.92 v1(68.41,10.92)
T4: "INA 1.6" U6.35 | length 33.5
  Top Layer w0.2: v1(37.62,32.84) 37.744,32.964 37.744,33.514 37.895,33.665 U6.35@37.895,36.555
  Top Layer w0.254: 30.68,6.81 30.704,6.786 32.162,6.786 v1(32.164,6.788)
  Layer 4 w0.254: v1@32.12,6.92 32.164,6.964 32.164,17.086 37.62,22.542 v1(37.62,32.84)
Tx_Can: U6.81 UC2.1 | length 37.8
  Top Layer w0.2: v1(41.837,47.294) 41.895,47.352 U6.81@41.895,49.605
  Top Layer w0.254: v1(61.68,31.83) 61.68,35.1 61.957,35.377 61.957,36.232 UC2.1@62.155,36.43
  Layer 4 w0.254: v1(41.837,47.294) 41.95,47.181 41.95,45.65 46.99,40.61 46.99,34.73 49.975,31.745 61.595,31.745 v1(61.68,31.83)
TX_CAN3: U6.90 UC1.1 | length 50.7
  Top Layer w0.2: U6.90@38.295,49.605 38.295,50.413 38.79,50.908 v1(38.79,52.86)
  Top Layer w0.254: v1(-5.263,48.135) -5.244,48.154 -5.244,49.334 UC1.1@-5.26,49.35
  Layer 1 w0.2: v1(-5.263,48.135) -5.087,48.135 -4.892,48.33 -2.29,48.33 2.24,52.86 v1(38.79,52.86)
V1: "INA 2.3" R29.1 R37.1 | length 12.3
  Top Layer w0.254: R37.1@55.635,23.72 58.659,23.72 59.114,24.175 60.268,24.175 v1(60.32,24.123) ; v1@60.32,24.13 60.342,24.153 62.093,24.153 62.115,24.175 ; v1(60.34,21.74) 63.41,21.74 R29.1@63.48,21.67
  Layer 4 w0.254: v1(60.32,24.123) 60.33,24.113 60.33,21.75 v1(60.34,21.74)
V2: "INA 3.3" R31.1 R38.1 | length 12.1
  Top Layer w0.254: R38.1@21.41,19.79 21.85,20.23 v1(25.55,20.23) R31.1@28.562,20.23 ; v1(25.453,23.249) 27.074,23.249 27.15,23.325
  Layer 4 w0.254: v1(25.453,23.249) 25.502,23.2 25.502,20.278 v1(25.55,20.23)
V3: "INA 4.3" R33.1 R39.1 | length 11.3
  Top Layer w0.254: R39.1@57.18,8.67 58.163,8.67 58.658,8.175 63.705,8.175 R33.1@63.8,8.08 ; v1(61.029,10.935) 62.59,10.935 62.66,11.005
  Layer 4 w0.254: v1(60.939,8.165) 60.939,10.844 v1(61.029,10.935)
V4: "INA 1.3" R35.1 R40.1 | length 9.2
  Top Layer w0.254: R40.1@21.75,6.87 21.797,6.823 v1(24.735,6.823) ; v1@24.71,6.87 24.751,6.911 25.737,6.911 25.826,7 26.41,7 ; v1(24.719,4.065) 24.744,4.09 R35.1@26.39,4.09
  Layer 4 w0.254: v1(24.719,4.065) 24.727,4.073 24.727,6.815 v1(24.735,6.823)
VCAP: CAP1.2 U6.85 | length 8.8
  Top Layer w0.2: U6.85@40.295,49.605 40.295,50.426 41.441,51.572 CAP1.2@47.76,51.572
ZRACK: OUT1.2 U4.3 | length 19.4
  Top Layer w0.254: v1(9.77,45.23) 9.805,45.195 12.474,45.195 U4.3@12.509,45.16
  Layer 4 w0.254: v1@9.96,45.28 9.77,45.47 9.77,57.93 OUT1.2@12.54,60.7
ZRACK-Reg: R7.1 R9.1 U6.94 Z4.1 | length 27.5
  Top Layer w0.2: v1(36.42,51.474) 36.42,51.298 36.695,51.023 U6.94@36.695,49.605
  Top Layer w0.254: Z4.1@14.8,42.54 14.8,42.73 15.28,43.21 R7.1@17.82,43.21 R9.1@20.5,43.21 ; R9.1@20.42,43.22 21.84,43.22 v1(24.1,45.48)
  Layer 1 w0.254: v1(24.1,45.48) 24.214,45.594 24.584,45.594 30.464,51.474 v1(36.42,51.474)
pads on no net: CAN1. CAN2. DASH1.MH3 DASH1.MH4 ICSP1. INT1.MH3 INT1.MH4 LTC1.3 LTC1.8 OUT1.MH3 OUT1.MH4 R37.3 R38.3 R39.3 R40.3 TEMP1.MH3 TEMP1.MH4 U6.1 U6.6 U6.7 U6.8 U6.9 U6.10 U6.11 U6.12 U6.14 U6.17 U6.19 U6.20 U6.21 U6.22 U6.23 U6.24 U6.25 U6.28 U6.29 U6.32 U6.38 U6.39 U6.40 U6.41 U6.42 U6.47 U6.48 U6.49 U6.50 U6.51 U6.52 U6.53 U6.54 U6.55 U6.56 U6.57 U6.58 U6.59 U6.60 U6.61 U6.66 U6.67 U6.68 U6.69 U6.70 U6.71 U6.72 U6.73 U6.74 U6.76 U6.77 U6.78 U6.79 U6.82 U6.83 U6.84 U6.87 U6.88 U6.89 U6.92 U6.95 U6.96 U6.97

## Polygon pours and split planes (outlines as drawn)
GND on Top Layer "GND_L01_P010" (solid, pour order 10): -10.94,-2.13 -10.94,81.81 75.18,81.81 75.18,-2.13
GND on Bottom Layer "GND_L04_P011" (solid, pour order 11): -10.94,-2.13 -10.94,81.81 75.18,81.81 75.18,-2.13
GND on Layer 4 "GND_L03_P018" (solid, pour order 18): -10.94,-2.13 -10.94,81.81 75.18,81.81 75.18,-2.13
+5 on Layer 4 "+5_L03_P017" (solid, pour order 17): 19.64,59.04 19.64,-2.07 19.5,-2.21 -11.06,-2.21 -11.06,58.94 -10.96,59.04 19.68,59.04
GND on Layer 1 "GND_L02_P027" (solid, pour order 27): -10.94,-2.13 -10.94,81.81 75.18,81.81 75.18,-2.13

## Silkscreen, mask and mechanical layers (free items; w line width, h text height)
Top Overlay:
  region: 195 vertices and 41 holes, not listed, extent -7.995,-1.036 0.314,8.749